# EAGLE board TorqueSens v5 (EAGLE 9.3.2)
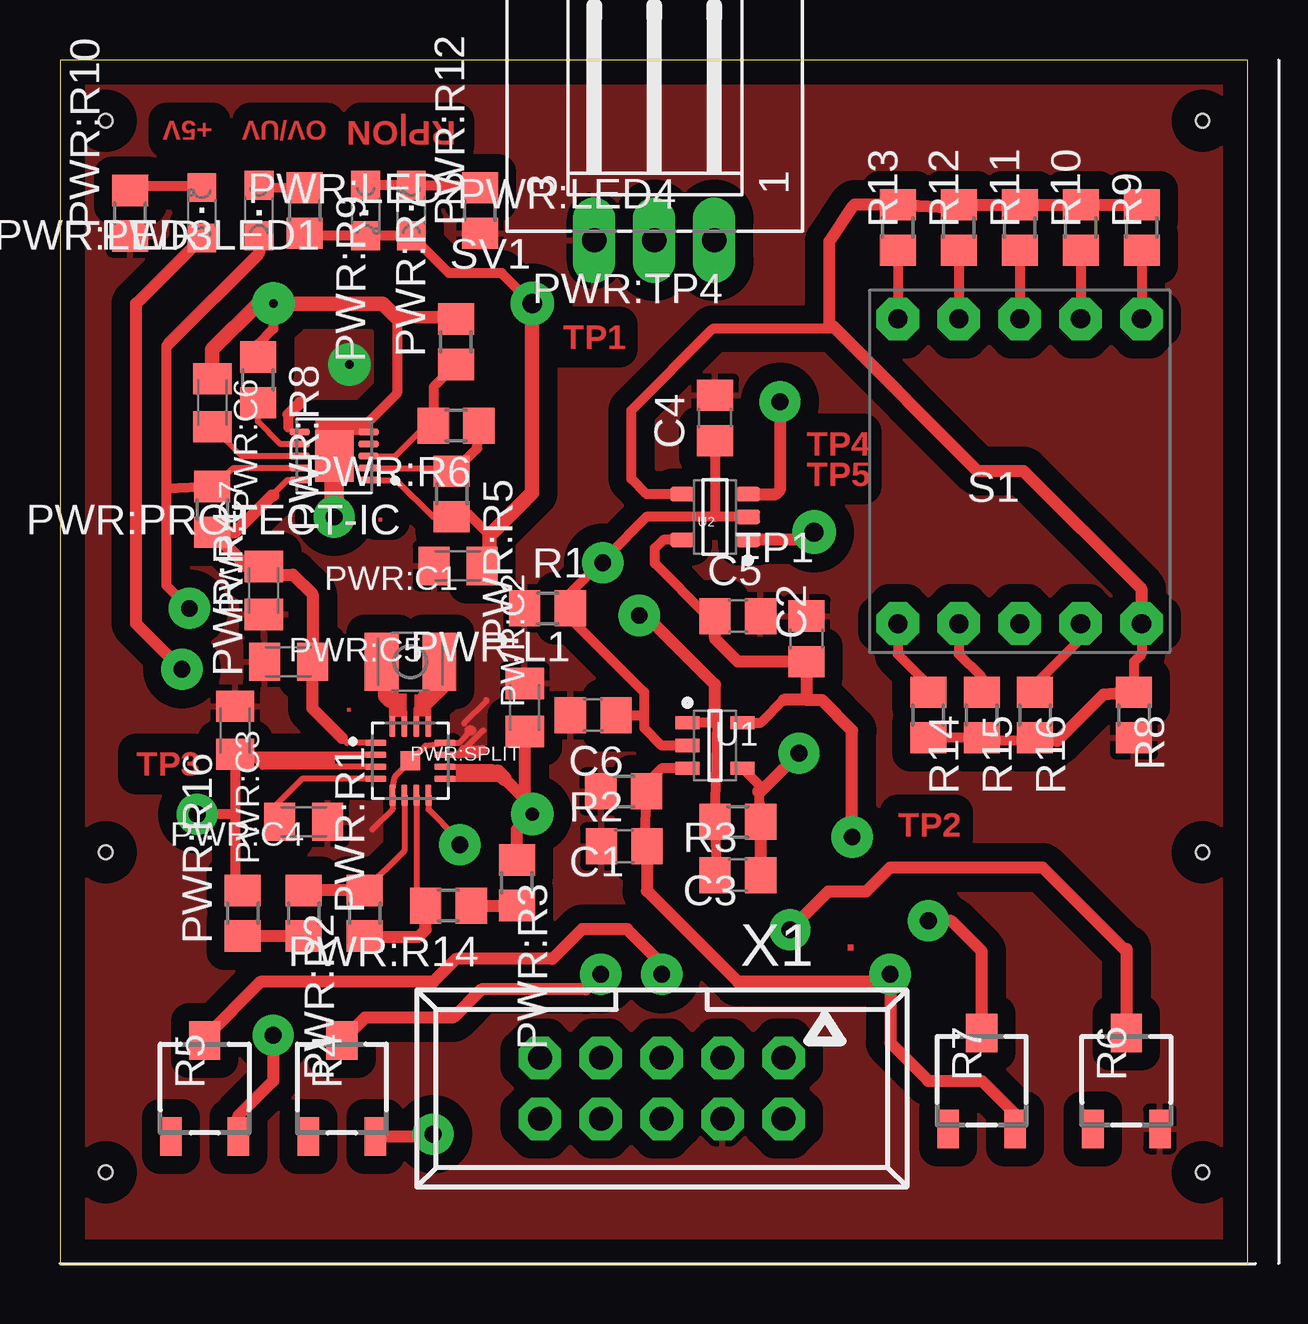
[diagram p0: board, top side]
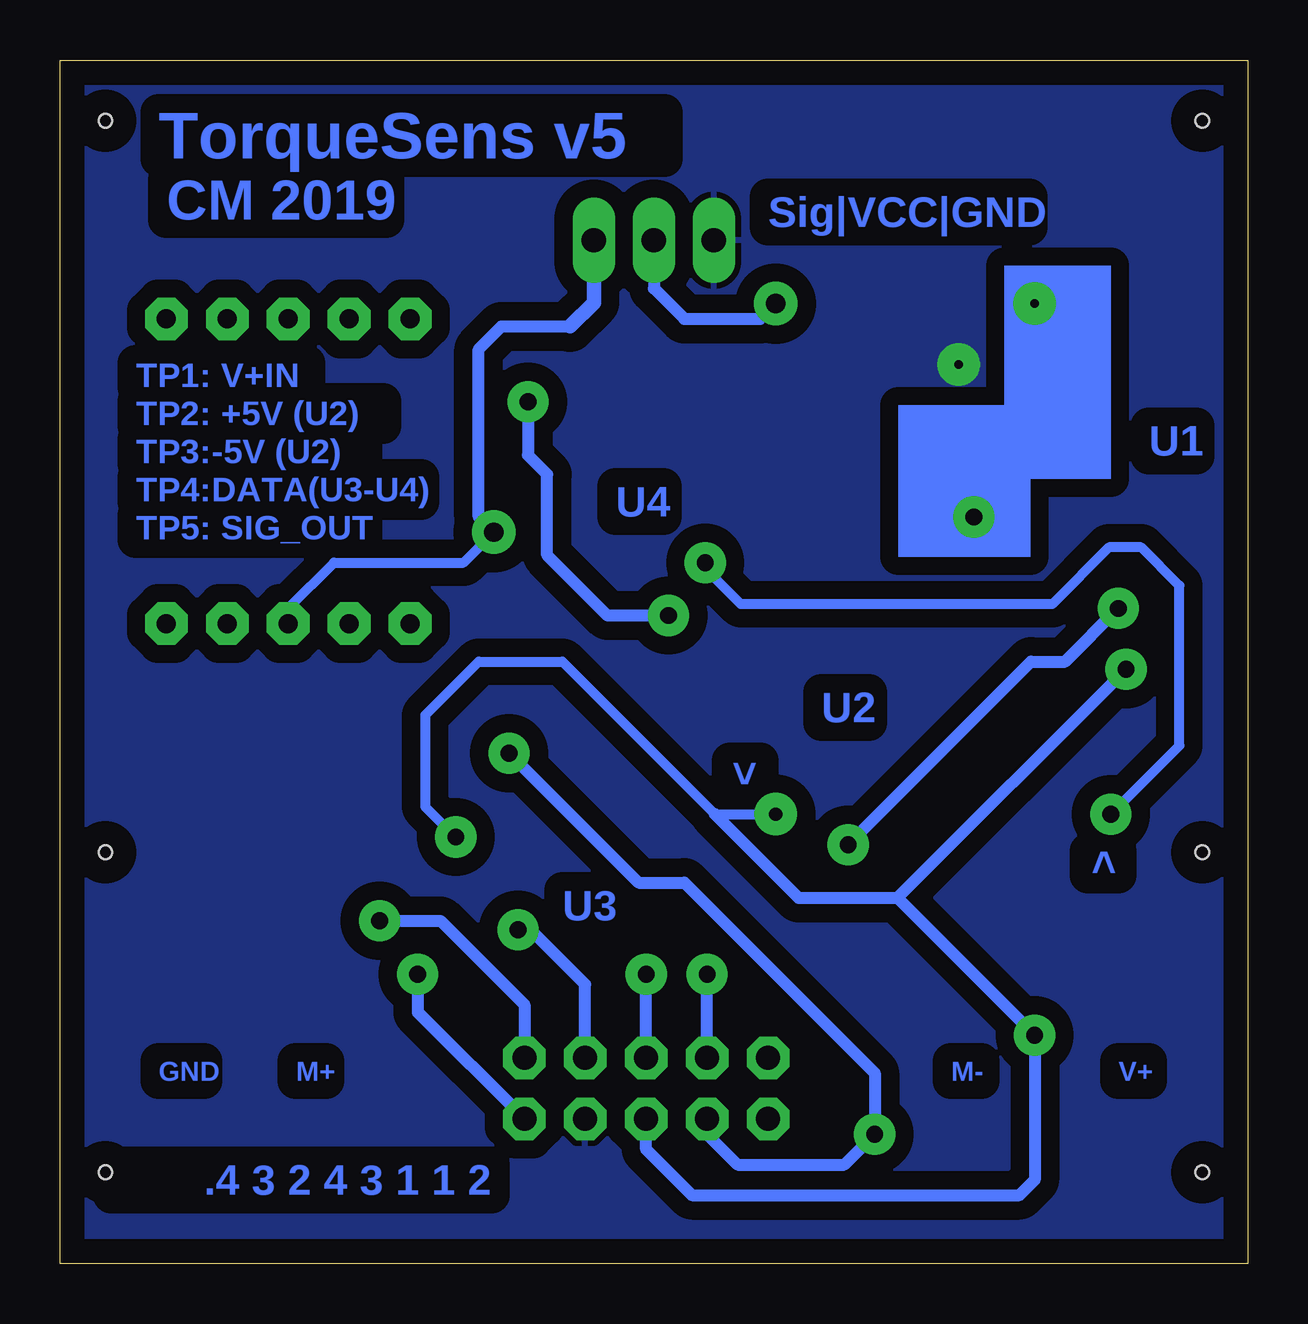
[diagram p1: board, bottom side, seen from below]

Size 49.52 x 50.16 mm. Coordinates in mm from the lower left corner, seen from the top.
Outline: 0,0 49.52,0 49.52,50.16 0,50.16 0,0
Copper layers (1*16): Top 0.035mm / dielectric 1.5mm / Bottom 0.035mm
Design rules "default *": minimum track width 10mil, minimum drill 0.7mm, track to track 30mil, track to pad 30mil, pad to pad 10mil, via to via 30mil, smd to smd 8mil, copper to edge 40mil, drill to drill 40mil, minimum pad ring 15mil, minimum via ring 20mil, stop-mask expansion 4mil, vias tented up to drill 0mil, thermal gap 10mil
Net classes: 0 default: width 0.254 mm, clearance 0.205 mm
Holes 0.55 mm at 1.91,47.62 47.62,47.62 47.62,3.81 1.91,3.81 1.91,17.14 47.62,17.14

## Footprints (pad centres in the part's own frame; a part is rotated, then mirrored left to right if it is on the bottom)
C0805 = smd 1.3 x 1.5: 1 -0.95,0; 2 0.95,0
C0805K = smd 1.3 x 1.6: 1 -1,0; 2 1,0
L2825P = smd 1.4 x 2.4: 1 -1.2,0; 2 1.2,0
CHIPLED_0805 = smd 1.2 x 1.2: A 0,-1.05; C 0,1.05
SON50P300X300X100-11N = smd 0.86 x 0.26: 1 -1.435,1; 2 -1.435,0.5; 3 -1.435,0; 4 -1.435,-0.5; 5 -1.435,-1; 6 1.435,-1; 7 1.435,-0.5; 8 1.435,0; 9 1.435,0.5; 10 1.435,1 | smd 1.6 x 2.15: 11 0,0
R0805 = smd 1.3 x 1.5: 1 -0.95,0; 2 0.95,0
QFN50P300X300X80-17N = smd 0.88 x 0.26: 1 -1.435,0.75; 2 -1.435,0.25; 3 -1.435,-0.25; 4 -1.435,-0.75; 9 1.435,-0.75; 10 1.435,-0.25; 11 1.435,0.25; 12 1.435,0.75 | smd 0.26 x 0.88: 5 -0.75,-1.435; 6 -0.25,-1.435; 7 0.25,-1.435; 8 0.75,-1.435; 13 0.75,1.435; 14 0.25,1.435; 15 -0.25,1.435; 16 -0.75,1.435 | smd 0.8 x 0.8: 17 0,0
B1,27 = smd 1.27 x 1.27: TP 0,0
3223J = smd 1.6 x 0.9: 1 -2,1.4; 3 -2,-1.4 | smd 1.6 x 1.3: 2 2,0
SW_SS-10-15SPE = drill 0.8 pad 1.778 octagon: 1 -5.08,6.35; 2 -2.54,6.35; 3 2.54,6.35; 4 5.08,6.35; 5 5.08,-6.35; 6 2.54,-6.35; 7 0,-6.35; 8 -2.54,-6.35; 9 -5.08,-6.35; C 0,6.35
L03P = drill 1.016 long: 1 2.5,-6.25; 2 0,-6.25; 3 -2.5,-6.25
LINEAR_TECHNOLOGY_LTC2050IS5_0 = smd 1 x 0.55: 1 -1.15,0.95; 2 -1.15,0; 3 -1.15,-0.95; 4 1.15,-0.95; 5 1.15,0.95
TI_NATIONAL_SEMICONDUCTOR_LMP7707MF-NOPB_1 = smd 1 x 0.6: 1 -1.375,0.95; 2 -1.375,0; 3 -1.375,-0.95; 4 1.375,-0.95; 5 1.375,0.95
057-010-1 = drill 1 octagon: 1 -5.08,-1.27; 2 -5.08,1.27; 3 -2.54,-1.27; 4 -2.54,1.27; 5 0,-1.27; 6 0,1.27; 7 2.54,-1.27; 8 2.54,1.27; 9 5.08,-1.27; 10 5.08,1.27

## Placement (x,y rotation side)
C1  0.1uF  [C0805]  23.52,17.39 180 top
C2  0.1uF  [C0805]  31.11,26.04 90 top
C3  0.1uF  [C0805]  28.26,16.19 180 top
C4  0.1uF  [C0805]  27.3,35.24 90 top
C5  0.1uF  [C0805]  28.26,26.99 0 top
C6  0.1uF  [C0805]  22.22,22.86 180 top
PWR:C1  1uF  [C0805K]  16.59,29.08 180 top
PWR:C2  4.7uF  [C0805K]  19.37,23.18 90 top
PWR:C3  4.7uF  [C0805K]  7.3,22.22 270 top
PWR:C4  100nF  [C0805K]  10.16,18.41 180 top
PWR:C5  10uF  [C0805K]  9.52,25.08 0 top
PWR:C6  10nF  [C0805K]  6.35,35.88 270 top
PWR:C7  10uF  [C0805K]  8.49,28.05 90 top
PWR:L1  2.2uH  [L2825P]  14.61,25.08 0 top
PWR:LED1  [CHIPLED_0805]  12.74,43.89 180 top
PWR:LED2  [CHIPLED_0805]  5.92,43.79 0 top
PWR:LED3  [CHIPLED_0805]  8.3,43.89 180 top
PWR:LED4  [CHIPLED_0805]  14.65,43.89 0 top
PWR:PROTECT-IC  [SON50P300X300X100-11N]  11.43,33.66 180 top
PWR:R1  120k  [R0805]  12.7,14.61 90 top
PWR:R2  470k  [R0805]  10.16,14.61 270 top
PWR:R3  330K  [R0805]  19.05,15.88 270 top
PWR:R4  100k  [R0805]  6.35,31.43 270 top
PWR:R5  120k  [R0805]  16.33,32.07 270 top
PWR:R6  6.8k  [R0805]  16.51,34.92 180 top
PWR:R7  33k  [R0805]  16.51,38.42 90 top
PWR:R8  22k  [R0805]  8.25,36.83 270 top
PWR:R9  120k  [R0805]  10.2,43.89 270 top
PWR:R10  200  [R0805]  2.92,43.77 90 top
PWR:R12  200  [R0805]  17.51,43.89 90 top
PWR:R14  2.2K  [R0805]  16.19,14.92 180 top
PWR:R16  2.2K  [R0805]  7.62,14.61 90 top
PWR:SPLIT  TPS65135TPS65135  [QFN50P300X300X80-17N]  14.61,20.95 0 top
PWR:TP4  PTR1B1,27  [B1,27]  19.68,40.01 0 top
R1  350  [R0805]  20.32,27.3 0 top
R2  18.2k  [R0805]  23.5,19.68 180 top
R3  18.2k  [R0805]  28.26,18.41 180 top
R4  [3223J]  11.75,7.3 90 top
R5  [3223J]  6.03,7.3 90 top
R6  [3223J]  44.45,7.62 90 top
R7  [3223J]  38.42,7.62 90 top
R8  1k  [R0805]  44.77,22.86 270 top
R9  50k  [R0805]  45.09,43.18 90 top
R10  22k  [R0805]  42.55,43.18 90 top
R11  10k  [R0805]  40.01,43.18 90 top
R12  10k  [R0805]  37.47,43.18 90 top
R13  5k  [R0805]  34.93,43.18 90 top
R14  1k  [R0805]  36.2,22.86 270 top
R15  560  [R0805]  38.42,22.86 270 top
R16  100  [R0805]  40.64,22.86 270 top
S1  SS-10-15SPE  [SW_SS-10-15SPE]  40.01,33.02 180 top
SV1  [L03P]  24.77,48.89 0 top
TP1  PTR1B1,27  [B1,27]  31.43,30.48 180 top
U1  LINEAR_TECHNOLOGY_LTC2050IS5LINEAR_TECHNOLOGY_LTC2050IS5_0_0  [LINEAR_TECHNOLOGY_LTC2050IS5_0]  27.3,21.59 0 top
U2  TI_NATIONAL_SEMICONDUCTOR_LMP7707MF-NOPBTI_NATIONAL_SEMICONDUCTOR_LMP7707MF-NOPB_0_1  [TI_NATIONAL_SEMICONDUCTOR_LMP7707MF-NOPB_1]  27.3,31.11 180 top
X1  057-010-1  [057-010-1]  25.08,7.3 180 top

## Library data of the parts
C1-C6 = rcl
PWR:C1-PWR:C7 = rcl; SPICEPREFIX: C
PWR:L1 = rcl; SPICEPREFIX: L
PWR:LED1-PWR:LED4 = led
PWR:PROTECT-IC = SON50P300X300X100-11N
PWR:R1-PWR:R10 PWR:R12 PWR:R14 PWR:R16 R1-R3 R8-R16 = rcl; SPICEPREFIX: R
PWR:SPLIT = QFN50P300X300X80-17N
PWR:TP4 TP1 = testpad
R4-R7 = pot
S1 = SS-10-15SPE; AVAILABILITY: Unavailable; DESCRIPTION: Switch Rotary SP Screwdriver PC Pins 0.1A 5VDC Plastic Bag; MF: Nidec Copal; MP: SS-10-15SPE; PACKAGE: None; PRICE: None
SV1 = con-amp-mt; OC_FARNELL: unknown; OC_NEWARK: unknown
U1 = Linear Technology - LTC2050IS5; CHANNELS_: 1; CIIVA_IDS: 8827709; CODE__JEDEC: MO-193; COMPONENT_LINK_1_DESCRIPTION: Manufacturer URL; COMPONENT_LINK_1_URL: http://www.linear.com/; COMPONENT_LINK_3_DESCRIPTION: Package Specification; COMPONENT_LINK_3_URL: http://cds.linear.com/docs/en/packaging/SOT_5_05-08-1635.pdf; DATASHEET: http://cds.linear.com/docs/en/datasheet/2050fc.pdf; DATASHEET_VERSION: Rev C; FOOTPRINT_VARIANT_NAME_0: Level C; FOOTPRINT_VARIANT_NAME_1: Level B; FOOTPRINT_VARIANT_NAME_2: Level A; GBW_MHZ_TYPICAL: 3; IMPORTED: yes; IMPORTED_FROM: vault; IMPORT_TS: 1521848410; IS_MA_TYPICAL: 0.8; LINEAR_TECHNOLOGY_PART_NUMBER: LTC2050; MF: Linear Technology; MOUNTING_TECHNOLOGY: Surface Mount; MPN: LTC2050IS5; PACKAGE: LT-S5-5-TSOT-23; PACKAGE_DESCRIPTION: 5-Lead Plastic TSOT-23, Body 1.63 x 2.90 mm, Pitch 0.95 mm; PREFIX: U; RELEASE_DATE: 1378745203; SR_VUS_TYPICAL: 2; TYPE: ZD; VAULT_GUID: 8555B049-ED4F-4380-B7FA-2379FF4543B7; VAULT_REVISION: DA8BFDE5-EBAF-4C16-8E03-9404D310B1D4; VOS_MV_TYPICAL: 0.0005; VS_MAX_V: 6; VS_MIN_V: 2.7
U2 = NOPB; CIIVA_IDS: 1322878; COMPONENT_LINK_1_DESCRIPTION: Datasheet URL; COMPONENT_LINK_1_URL: http://www.ti.com/general/docs/lit/getliterature.tsp?genericPartNumber=LMP7707&fileType=pdf; COMP_TYPE: Amplifiers; FOOTPRINT_VARIANT_NAME_0: Level C; FOOTPRINT_VARIANT_NAME_1: Level B; FOOTPRINT_VARIANT_NAME_2: Level A; IMPORTED: yes; IMPORTED_FROM: vault; IMPORT_TS: 1521865583; MF: TI National Semiconductor; MPN: LMP7707MF/NOPB; PACKAGE_DESCRIPTION: Molded SOT-23, .115 x .063 x .040 in Body, 5 Lead, .0375 in Pitch; PACKAGE_REFERENCE: DBV0005A; PACKAGE_TOP_MARKING: AH4A*XTT; PIN_COUNT: 5; POWER_WISE: Y; PREFIX: U; RELEASE_DATE: 1464069256; ROHS: Yes; VAULT_GUID: D2A2C10E-6A8E-42CA-BB51-102401FD650E; VAULT_REVISION: 935156D0-10AB-4BAD-9D3C-6DAEB643FFBC
X1 = con-panduit; OC_FARNELL: unknown; OC_NEWARK: unknown

## Nets
GND: C1.2 C2.2 C4.2 C5.2 C6.2 PWR:C1.2 PWR:C2.2 PWR:C3.1 PWR:C4.1 PWR:C5.1 PWR:C7.1 PWR:PROTECT-IC.6 PWR:R10.1 PWR:R12.1 PWR:SPLIT.5 PWR:SPLIT.11 PWR:SPLIT.12 R1.1 R2.2 R6.3 R8.2 SV1.3 X1.4
M+: C1.1 R2.1 R7.3 U1.3 X1.2
M-: C3.1 R3.1 R4.3 U1.4 X1.8
N$1: R4.2 X1.7
N$2: R9.1 S1.9
N$3: R8.1 R9.2 R10.2 R11.2 R12.2 R13.2 R14.2 R15.2 R16.2 S1.1 U2.4
N$4: R5.2 X1.5
N$5: R10.1 S1.8
N$6: R6.2 X1.3
N$7: R11.1 S1.7
N$8: R7.2 X1.1
N$11: R12.1 S1.6
N$12: R13.1 S1.5
N$13: R14.1 S1.4
N$14: R15.1 S1.3
N$15: R16.1 S1.2
OUT-BRIDGE: C3.2 R3.2 U1.1 U2.3
OUTAMP: S1.C SV1.1 TP1.TP U2.1
PWR:+5V(U1-U2): PWR:C5.2 PWR:C7.2 PWR:PROTECT-IC.10 PWR:R4.2 PWR:SPLIT.1
PWR:EN-FLT: PWR:LED3.C PWR:PROTECT-IC.9 PWR:R4.1 PWR:SPLIT.8
PWR:N$1: PWR:PROTECT-IC.2 PWR:R5.1 PWR:R6.1
PWR:N$2: PWR:L1.1 PWR:SPLIT.15 PWR:SPLIT.16
PWR:N$3: PWR:L1.2 PWR:SPLIT.13 PWR:SPLIT.14
PWR:N$4: PWR:C6.2 PWR:PROTECT-IC.8
PWR:N$5: PWR:R1.1 PWR:R14.2 PWR:SPLIT.7
PWR:N$6: PWR:LED3.A PWR:R9.1
PWR:N$8: PWR:C4.2 PWR:SPLIT.4
PWR:N$9: PWR:PROTECT-IC.7 PWR:R8.2
PWR:N$10: PWR:LED2.C PWR:R10.2
PWR:N$17: PWR:LED1.A PWR:LED4.C PWR:R12.2
PWR:N$18: PWR:R3.2 PWR:R14.1
PWR:N$21: PWR:R1.2 PWR:R2.1 PWR:SPLIT.6
PWR:N$22: PWR:R2.2 PWR:R16.1
PWR:OVP: PWR:PROTECT-IC.3 PWR:R6.2 PWR:R7.1
PWR:RTN_LINE: PWR:C6.1 PWR:PROTECT-IC.5 PWR:PROTECT-IC.11 PWR:R7.2 PWR:R8.1
V+IN: PWR:C1.1 PWR:LED1.C PWR:LED4.A PWR:PROTECT-IC.1 PWR:R5.2 PWR:R9.2 PWR:TP4.TP SV1.2
V+OUT_SPLIT: C2.1 C5.1 PWR:C2.1 PWR:LED2.A PWR:R3.1 PWR:SPLIT.9 PWR:SPLIT.10 R5.3 U1.5 U2.5 X1.6
V-OUT_SPLIT: C4.1 C6.1 PWR:C3.2 PWR:R16.2 PWR:SPLIT.2 PWR:SPLIT.3 R1.2 U1.2 U2.2

## Tracks (layer width: path | path; a pad name or v marks a point on that pad's centre or on a via)
GND  (via drill 0.35 pad 1.78)
  Top 0.254: 17.14,22.22 16.62,21.7 PWR:SPLIT.12 15.24,21.59 13.97,20.32 arc16 PWR:SPLIT.5 13.86,18.93 13.02,18.1 | 16.85,22.52 17.78,23.45 17.78,23.49 | PWR:SPLIT.11 16.62,21.2 | 16.62,21.2 17.39,21.2 17.59,21.4 | 17.64,22.22 16.62,21.2 | PWR:PROTECT-IC.6 9.72,34.66 9.52,34.85
  Top 0.305: 16.62,21.2 16.81,21.4
  Top 0.406: 17.14,22.22 17.06,22.22 | 16.81,21.4 17.59,21.4 | 9.52,34.85 9.52,35.39
  Top 0.508: 9.52,35.39 10,35.86
  other vias: 12.07,37.46
  pour Bottom: 0,50.16 49.53,50.16 49.53,0 0,0
  pour Top: 0,50.16 49.53,50.16 49.53,0 0,0
M+  (via drill 0.7)
  Top 0.406: C1.1 24.34,17.51 R2.1 24.34,19.9 25.08,20.64 U1.3
  Top 0.508: C1.1 24.47,15.54 28.26,11.75 33.97,11.75 34.29,12.07 v34.61,12.07 34.61,9.21 36.2,7.62 38.42,7.62 39.82,6.22 R7.3
  Bottom 0.508: v34.61,12.07 34.61,10.48 X1.2
M-  (via drill 0.7)
  Top 0.406: U1.4 29.11,19.99 29.11,19.68 R3.1
  Top 0.508: v30.8,21.27 29.21,19.68 29.11,19.68 | R3.1 C3.1 | R4.3 15.56,5.3 v15.56,5.4
  Bottom 0.508: X1.8 22.54,5.4 21.27,4.13 16.83,4.13 v15.56,5.4 15.56,7.94 23.5,15.88 25.4,15.88 v30.8,21.27
N$1  (via drill 0.7)
  Top 0.508: R4.2 12.7,10.25 16.38,10.25 17.56,11.43 21.91,11.43 v22.54,12.07
  Bottom 0.508: X1.7 v22.54,12.07
N$2
  Top 0.406: R9.1 S1.9
N$3
  Top 0.254: R16.2 40.87,21.78 | 37.05,44.03 37.15,44.13 37.31,44.13 R12.2
  Top 0.406: 32.33,38.95 27.2,38.95 23.81,35.56 23.81,32.7 24.45,32.06 U2.4 | 40.87,21.78 38.65,21.78 R15.2 R14.2 | S1.1 45.09,25.4 44.77,25.08 R8.1
  Top 0.508: 40.87,21.78 41.57,21.78 43.5,23.71 R8.1 | S1.1 45.09,28.09 40.16,33.02 38.26,33.02 32.33,38.95 32.07,39.22 32.07,42.6 33.02,44.03 33.12,44.13 R13.2 37.05,44.03 | R12.2 R11.2 R10.2 R9.2
N$4  (via drill 0.7)
  Top 0.254: 6.03,9.42 R5.2
  Top 0.508: 6.03,9.42 8.35,11.75 15.56,11.75 16.51,12.7 20.53,12.7 21.77,13.94 23.64,13.94 25.08,12.49 v25.08,12.07
  Bottom 0.508: X1.5 v25.08,12.07
N$5
  Top 0.406: R10.1 S1.8
N$6  (via drill 0.7)
  Top 0.508: v30.43,13.91 32.01,15.5 33.6,15.5 34.61,16.51 40.96,16.51 44.37,13.1 44.45,13.12 R6.2
  Bottom 0.508: X1.3 27.62,11.64 29.9,13.91 v30.43,13.91
N$7
  Top 0.406: R11.1 S1.7
N$8  (via drill 0.7)
  Top 0.508: R7.2 38.42,13.02 37.15,14.29 v36.2,14.29
  Bottom 0.508: v36.2,14.29 33.66,14.29 30.16,10.8 X1.1
N$11
  Top 0.406: R12.1 S1.6
N$12
  Top 0.406: R13.1 S1.5
N$13
  Top 0.406: S1.4 34.93,25.4 36.2,24.13 R14.1
N$14
  Top 0.406: S1.3 37.47,25.4 38.42,24.45 R15.1
N$15
  Top 0.406: R16.1 40.64,24.13 42.55,26.04 S1.2
OUT-BRIDGE  (via drill 0.7)
  Top 0.406: U1.1 27.3,22.54 27.41,22.54 R3.2 27.41,16.32 C3.2
  Top 0.508: 27.3,22.54 27.3,24.13 24.43,27.01 v24.15,27.01 | v30.01,35.91 30.01,32.23 29.84,32.06 U2.3
  Bottom 0.508: v24.15,27.01 26.69,27.01 29.21,29.53 29.21,32.89 30.01,33.69 v30.01,35.91
OUTAMP  (via drill 0.8 pad 1.78)
  Top 0.508: TP1.TP 31.12,30.16 U2.1
  Bottom 0.406: S1.C 40.01,27.3 38.1,29.21 32.7,29.21 TP1.TP
  Bottom 0.508: TP1.TP 32.07,31.11 32.07,38.1 31.11,39.05 28.26,39.05
  Bottom 0.61: 28.26,39.05 27.27,40.05 SV1.1
  other vias: 31.43,30.48
PWR:+5V(U1-U2)
  Top 0.254: PWR:SPLIT.1 11.95,21.7 11.75,21.91 | PWR:PROTECT-IC.10 9.48,32.66 8.83,32.01
  Top 0.406: PWR:C7.2 8.88,28.67 9.69,28.67 | 10.89,25.45 PWR:C5.2 10.52,24.45 | 10.64,23.02 10.52,23.13
  Top 0.508: 8.89,32.01 8.83,32.01 7.31,30.48 PWR:R4.2 7.78,29.05 PWR:C7.2 8.83,28.72 9.71,28.72 10.52,27.91 PWR:C5.2 | 10.64,23.02 11.75,21.91 | 10.52,23.13 10.52,24.45
PWR:EN-FLT  (via drill 0.7)
  Top 0.254: PWR:SPLIT.8 15.36,18.93 16.51,17.78 16.51,17.62 v16.66,17.46 | PWR:PROTECT-IC.9 7.22,33.16 PWR:R4.1
  Top 0.406: v5.4,27.3 4.45,28.26 4.45,32.28 | PWR:R4.1 4.45,32.28 | 4.45,32.28 4.45,38.25 4.53,38.34
  Top 0.508: PWR:LED3.C 8.3,42.11 4.53,38.34
  Bottom 0.508: v16.66,17.46 9.05,25.08 7.62,25.08 v5.4,27.3
PWR:N$1
  Top 0.254: PWR:R5.1 16.27,33.16 PWR:PROTECT-IC.2
  Top 0.406: PWR:R5.1 16.42,33.01 17.39,33.98 PWR:R6.1
PWR:N$2
  Top 0.254: PWR:SPLIT.16 13.86,23.49 | PWR:SPLIT.15 14.36,22.99 14.02,23.33
  Top 0.508: 13.59,23.75 13.78,23.57 13.86,23.49 14.02,23.33
  Top 0.813: PWR:L1.1 13.66,24.82 13.66,23.69 13.78,23.57
PWR:N$3
  Top 0.254: PWR:SPLIT.14 14.86,23.11 15.24,23.49 15.36,23.61 | PWR:SPLIT.13 15.36,23.61 | 15.36,23.61 15.88,24.13
  Top 0.813: PWR:L1.2 arc-90 15.88,25.01 15.88,24.13 15.24,23.49
PWR:N$4
  Top 0.203: PWR:C6.2 7.62,33.61 7.62,33.66
  Top 0.254: PWR:PROTECT-IC.8 7.62,33.66
PWR:N$5
  Top 0.254: PWR:R14.2 14.86,15.31 PWR:SPLIT.7
  Top 0.508: PWR:R1.1 12.72,13.62 14.94,13.62 15.24,13.92 PWR:R14.2
PWR:N$6
  Top 0.406: PWR:R9.1 8.43,44.81 PWR:LED3.A
PWR:N$8
  Top 0.254: PWR:SPLIT.4 10.09,20.2 8.75,18.87 9.16,18.46 PWR:C4.2
PWR:N$9
  Top 0.254: PWR:PROTECT-IC.7 9.18,34.16 8.25,35.09 PWR:R8.2
PWR:N$10
  Top 0.406: PWR:LED2.C 5.87,44.89 3.09,44.89 PWR:R10.2
PWR:N$17
  Top 0.406: PWR:LED1.A PWR:LED4.C 17.41,44.94 PWR:R12.2
PWR:N$18
  Top 0.508: PWR:R3.2 PWR:R14.1
PWR:N$21
  Top 0.254: PWR:SPLIT.6 14.36,17.21 PWR:R1.2
  Top 0.508: PWR:R1.2 PWR:R2.1
PWR:N$22
  Top 0.508: PWR:R2.2 PWR:R16.1
PWR:OVP
  Top 0.254: PWR:PROTECT-IC.3 13.97,33.66 15.24,34.92 PWR:R6.2
  Top 0.406: PWR:R7.1 15.58,36.53 15.58,34.94 PWR:R6.2
PWR:RTN_LINE  (via drill 0.35 pad 1.78, 0.7)
  Top 0.254: 12.86,35.09 PWR:PROTECT-IC.5 11.8,34.66 11.43,34.29 PWR:PROTECT-IC.11 | 13.95,39.5 13.97,39.53 14.04,39.37
  Top 0.406: v8.89,40.01 8.89,38.95 8.25,38.31 PWR:R8.1 | PWR:R7.2 14.04,39.37 14.04,36.27 12.86,35.09 | 16.06,39.49 13.96,39.49
  Top 0.61: PWR:C6.1 6.35,38.1 8.25,40.01 v8.89,40.01 13.44,40.01 13.95,39.5 13.96,39.49
  Top 0.813: PWR:PROTECT-IC.11 v11.43,31.11
V+IN  (via drill 0.8 pad 1.78)
  Top 0.254: PWR:PROTECT-IC.1 14.02,32.66 15.55,31.12 PWR:R5.2 | PWR:C1.1 17.28,29.38
  Top 0.406: PWR:R5.2 17.04,31.22 17.9,30.36 17.9,29.39 PWR:C1.1 | PWR:TP4.TP 18.41,41.27 16.21,41.27 PWR:LED4.A PWR:LED1.C 10.4,42.84 PWR:R9.2
  Top 0.61: PWR:TP4.TP 19.68,32.13 17.9,30.35 17.9,29.39
  Bottom 0.508: SV1.2 24.77,40.64 23.5,39.37 20.32,39.37 PWR:TP4.TP
  other vias: 19.68,40.01
V+OUT_SPLIT  (via drill 0.55 pad 1.78, 0.7)
  Top 0.254: PWR:SPLIT.9 18.53,20.2 | PWR:SPLIT.10 18.03,20.7 18.23,20.5 18.41,20.32
  Top 0.406: U2.5 25.15,30.16 24.8,29.81 24.8,29.18 26.99,26.99 C5.1 | U1.5 29.21,22.54 30.16,23.49
  Top 0.508: PWR:C2.1 19.37,19.37 | 19.37,19.37 19.68,19.05 v19.68,18.73 | v19.68,18.73 19.65,18.73 | 19.37,19.37 18.53,20.2 | v5.08,24.77 3.17,26.67 3.17,40.01 5.72,42.55 PWR:LED2.A | PWR:R3.1 19.05,18.1 v19.68,18.73 | v33.02,17.78 33.02,22.22 31.75,23.49 31.11,23.49 | 31.11,23.49 C2.1 28.26,25.09 27.31,26.04 C5.1 | 31.11,23.49 30.16,23.49 | v8.89,9.53 8.89,7.62 7.43,6.16 R5.3
  Top 0.61: 18.53,20.2 18.23,20.5
  Bottom 0.406: v33.02,17.78 34.29,19.05 34.29,22.86 32.07,25.08 28.57,25.08 22.22,18.73 v19.68,18.73
  Bottom 0.508: 14.61,15.24 18.73,15.24 22.22,18.73 | 14.61,15.24 v5.08,24.77 | X1.6 25.08,4.76 23.18,2.86 9.52,2.86 8.89,3.49 v8.89,9.53 14.61,15.24
V-OUT_SPLIT  (via drill 0.7)
  Top 0.254: PWR:SPLIT.2 7.94,21.2 | 7.94,21.2 7.32,21.2 PWR:C3.2 | PWR:SPLIT.3 8.44,20.7 7.94,21.2
  Top 0.406: PWR:C3.2 7.3,18.73 | 7.3,18.73 7.3,15.5 PWR:R16.2 | 24.34,22.86 24.34,23.81 21.17,26.99 R1.2 21.24,27.91 22.86,29.53 24.45,31.11 27.3,31.11 | 24.34,22.86 24.34,22.33 25.08,21.59 U1.2 | U2.2 27.3,31.11 | C4.1 27.3,31.11 | 7.3,18.73 v5.72,18.73 | C6.1 24.34,22.86
  Top 0.61: v22.62,29.21 22.86,29.45 22.86,29.53
  Bottom 0.406: v5.72,18.73 2.86,21.59 2.86,28.26 4.45,29.84 5.79,29.84 8.16,27.48 21.13,27.48 22.62,28.97 v22.62,29.21
(copper drawn outside any net)
  shapes: Bottom area x2, Top area x6

## Text on the board
Top: +5V | OV/UV | RP|ON | TP1 | TP4 | TP5 | . | . | TP3 | TP2 | .
Bottom: TorqueSens v5 | Sig|VCC|GND | CM 2019 | TP1: V+IN | TP2: +5V (U2) | U1 | TP3:-5V (U2) | U4 | TP4:DATA(U3-U4) | TP5: SIG_OUT | U2 | > | > | U3 | V+ | M- | M+ | GND | .4 3 2 4 3 1 1 2
Document: TP1 | TP4 | TP5 | TP3 | TP2
Reference: Sig|VCC|GND | CM 2019 | TorqueSens v5 | . | . 4 3 2 4 3 1 1 2 | . | .